# EAGLE board latchbox-lite-stencil (EAGLE 6.6.0)
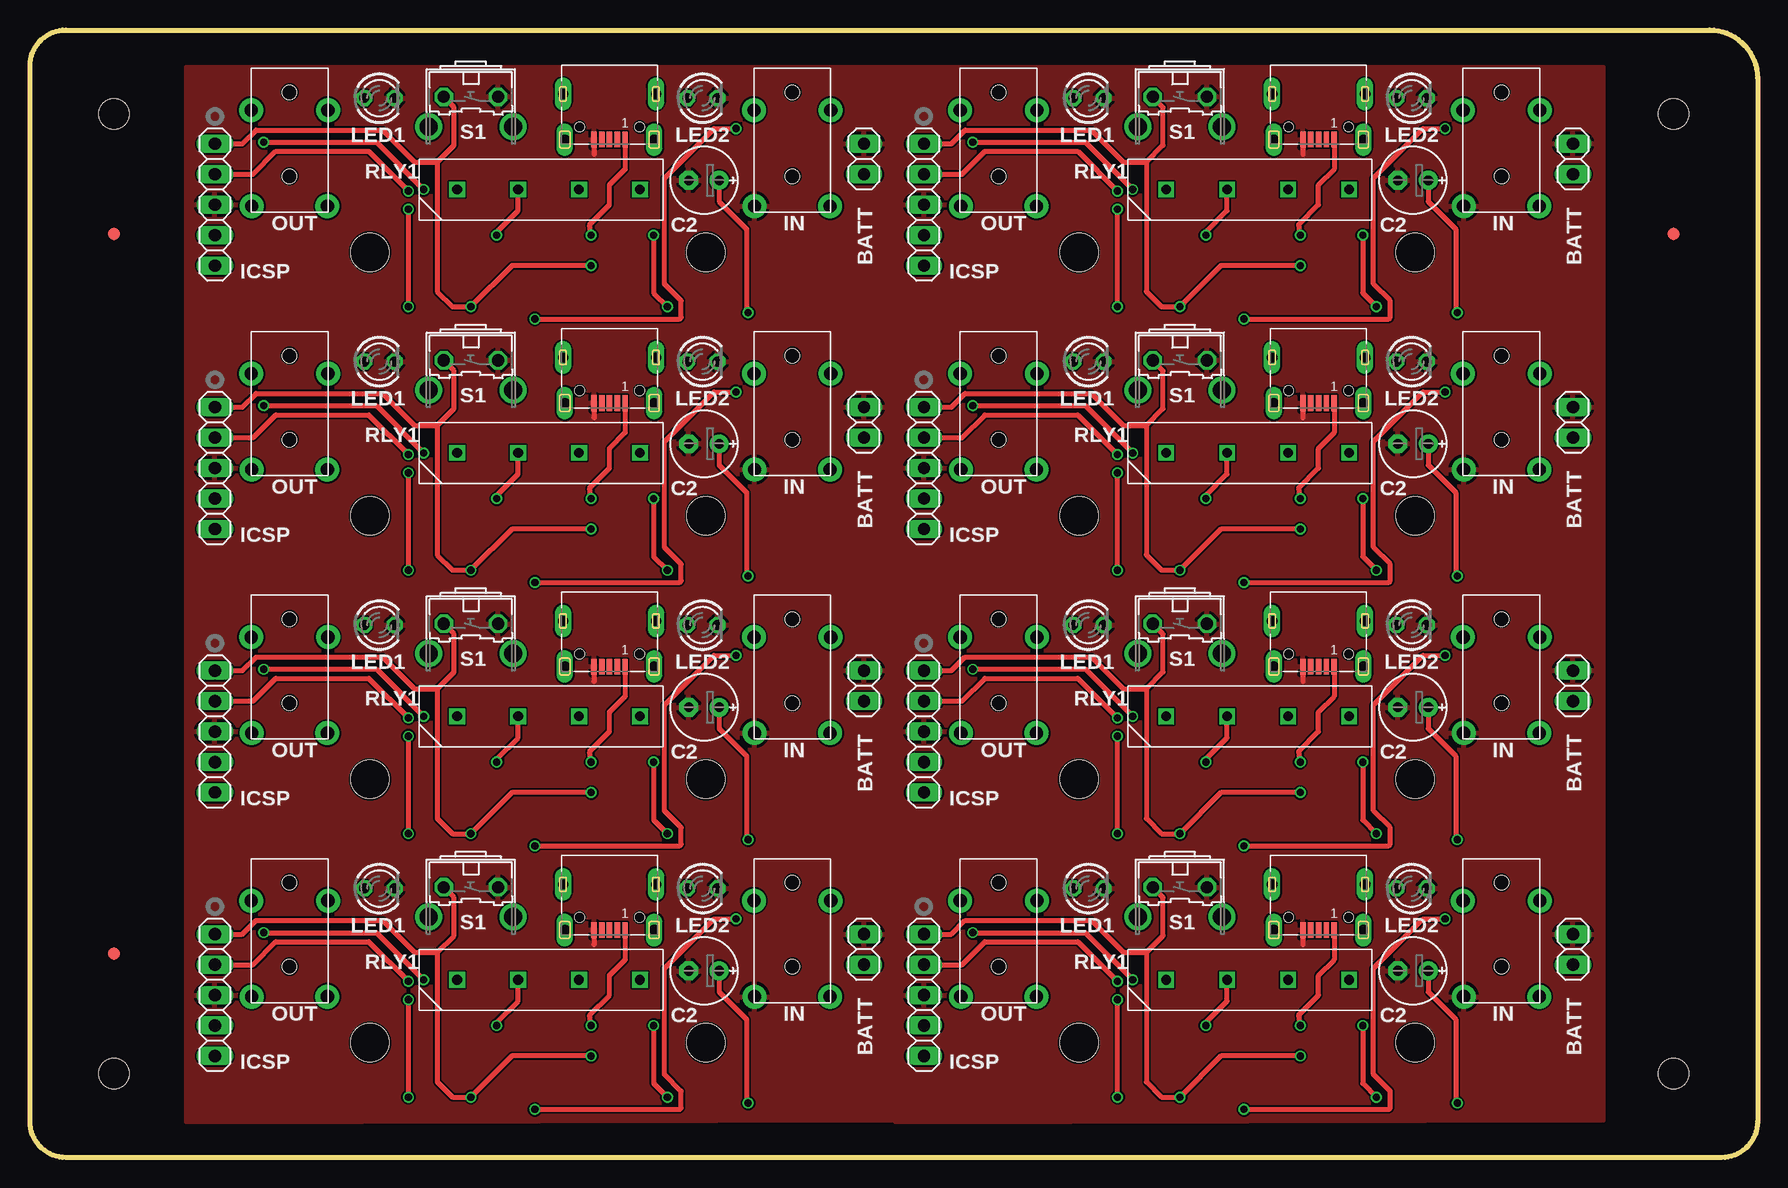
[diagram p0: board, top side]
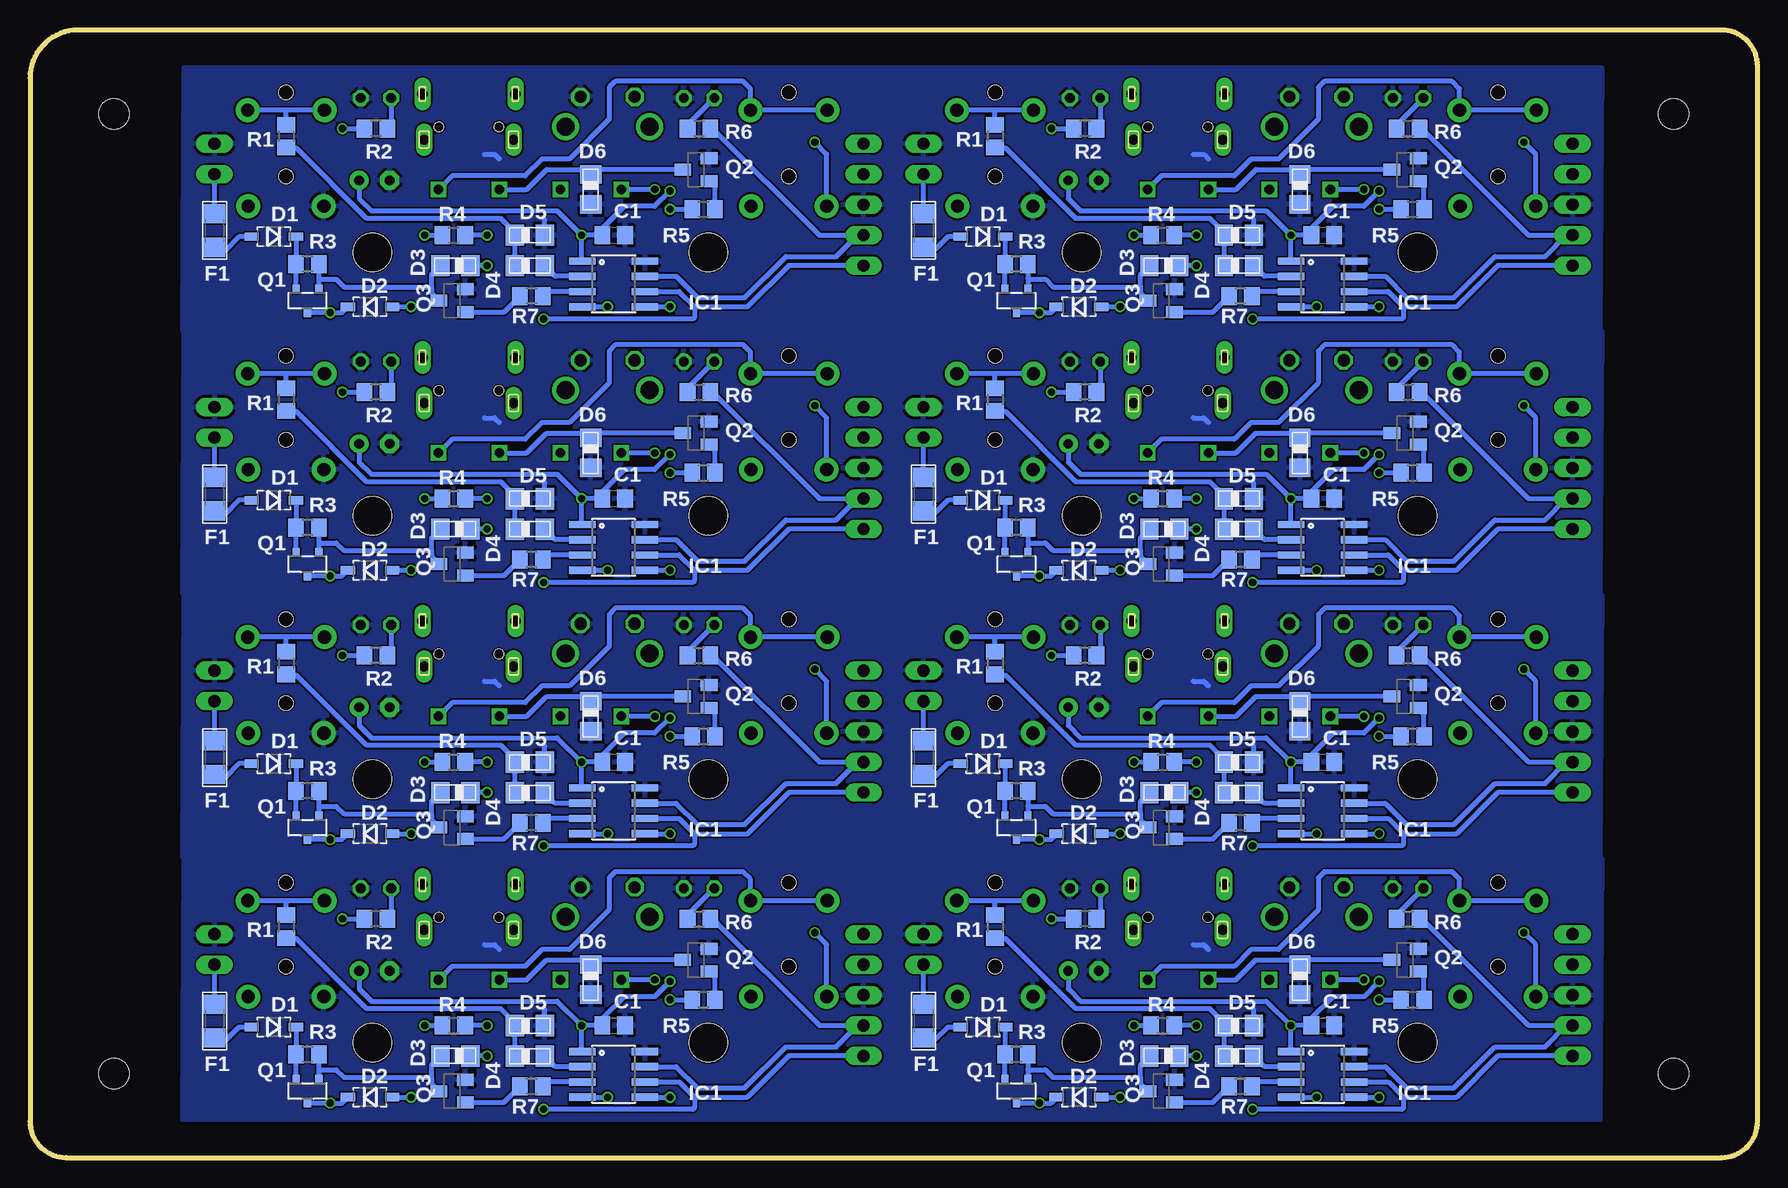
[diagram p1: board, bottom side, seen from below]

Size 144 x 94 mm. Coordinates in mm from the lower left corner, seen from the top.
Outline: 0,91 arc-90 3,94 140,94 arc-90 144,90 144,3 arc-90 141,0 3,0 arc-90 0,3 0,91
Copper layers (1*16): Top 0.035mm / dielectric 1.5mm / Bottom 0.035mm
Design rules "hackvana": minimum track width 6mil, minimum drill 0.3mm, track to track 6mil, track to pad 9mil, pad to pad 6mil, via to via 6mil, smd to smd 0mil, copper to edge 6mil, drill to drill 6mil, minimum pad ring 10mil, minimum via ring 6mil, stop-mask expansion 2mil, vias tented up to drill 100mil, thermal gap 10mil
Holes 3.2 mm at 28.34,9.57 56.34,9.57 28.34,31.54 56.34,31.54 28.34,53.5 56.34,53.5 28.34,75.46 56.34,75.46 87.44,9.57 115.44,9.57 87.44,31.54 115.44,31.54 87.44,53.5 115.44,53.5 87.44,75.46 115.44,75.46
Holes 2.54 mm at 7,87 137,87 7,7 137,7

## Footprints (pad centres in the part's own frame; a part is rotated, then mirrored left to right if it is on the bottom)
1X02 = drill 1.016 long: 1 -1.27,0; 2 1.27,0
C0805 = smd 1.3 x 1.5: 1 -0.95,0; 2 0.95,0
E2,5-6E = drill 0.813 pad 1.575: + -1.27,0 | drill 0.813 pad 1.575 octagon: - 1.27,0
SOD-123 = smd 1.2 x 0.7: A 1.85,0; C -1.85,0
0805DIODE = smd 1.524 x 1.778: A -1.262,-0.005; C 1.238,-0.005
FIDUCIAL_1MM = smd 1 x 1: 1 0,0
1206 = smd 1.6 x 1.8: 1 -1.4,0; 2 1.4,0
SO08 = smd 0.61 x 2.21: 1 -1.905,-2.616; 2 -0.635,-2.616; 3 0.635,-2.616; 4 1.905,-2.616; 5 1.905,2.616; 6 0.635,2.616; 7 -0.635,2.616; 8 -1.905,2.616
1X05 = drill 1.016 long: 1 -5.08,0; 2 -2.54,0; 3 0,0; 4 2.54,0; 5 5.08,0
3_5MM_PTH_MICRO = drill 1.1 pad 2: 1 -3.15,-8; 2 -3.2,0; 2A 3.2,0; 3 3.15,-8 | hole 1.2: 0,1.5; 0,-5.5
LED3MM = drill 0.813 octagon: A -1.27,0; K 1.27,0
SOT23-R = smd 0.6 x 0.7: 1 -0.95,-1; 2 0.95,-1; 3 0,1
SOT23-BEC = smd 1 x 1.4: B -0.95,-1.1; C 0,1.1; E 0.95,-1.1
R0805 = smd 1.3 x 1.5: 1 -0.95,0; 2 0.95,0
9007-REED-RELAY = drill 0.8 square: P$1 0,7.62; P$2 0,2.54; P$3 0,-2.54; P$4 0,-7.62
B3F-31XX = drill 1.016 octagon: 1 -2.261,-1.245; 2 2.261,-1.245 | drill 1.499 pad 2.159: 3 -3.505,1.245; 4 3.505,1.245
629105150521 = smd 0.45 x 1.3: 1 -1.3,1.05; 2 -0.65,1.05; 3 0,1.05; 4 0.65,1.05; 5 1.3,1.05 | drill 0.85 pad 1.2 long: SHELL -3.725,1.05; SHELL1 3.725,1.05; SHELL2 -3.875,-2.75; SHELL3 3.875,-2.75 | hole 0.8: -2.5,0; 2.5,0

## Placement (x,y rotation side)
BATT  [1X02]  69.52,17.35 270 top
BATT1  [1X02]  69.52,39.32 270 top
BATT2  [1X02]  69.52,61.28 270 top
BATT3  [1X02]  69.52,83.24 270 top
BATT4  [1X02]  128.62,17.35 270 top
BATT5  [1X02]  128.62,39.32 270 top
BATT6  [1X02]  128.62,61.28 270 top
BATT7  [1X02]  128.62,83.24 270 top
C1  [C0805]  36.24,11 0 bottom
C2  4u7  [E2,5-6E]  56.18,15.57 180 top
C3  [C0805]  36.24,32.97 0 bottom
C4  4u7  [E2,5-6E]  56.18,37.54 180 top
C5  [C0805]  36.24,54.93 0 bottom
C6  4u7  [E2,5-6E]  56.18,59.5 180 top
C7  [C0805]  36.24,76.89 0 bottom
C8  4u7  [E2,5-6E]  56.18,81.47 180 top
C9  [C0805]  95.35,11 0 bottom
C10  4u7  [E2,5-6E]  115.29,15.57 180 top
C11  [C0805]  95.35,32.97 0 bottom
C12  4u7  [E2,5-6E]  115.29,37.54 180 top
C13  [C0805]  95.35,54.93 0 bottom
C14  4u7  [E2,5-6E]  115.29,59.5 180 top
C15  [C0805]  95.35,76.89 0 bottom
C16  4u7  [E2,5-6E]  115.29,81.47 180 top
D1  [SOD-123]  64.56,10.87 180 bottom
D2  [SOD-123]  56.56,5.03 0 bottom
D3  0805DIODE  [0805DIODE]  49.45,8.46 180 bottom
D4  0805DIODE  [0805DIODE]  43.23,8.46 0 bottom
D5  0805DIODE  [0805DIODE]  43.23,11 0 bottom
D6  0805DIODE  [0805DIODE]  38.15,14.81 270 bottom
D7  0805DIODE  [0805DIODE]  43.23,32.97 0 bottom
D8  0805DIODE  [0805DIODE]  38.15,36.78 270 bottom
D9  [SOD-123]  64.56,32.84 180 bottom
D10  0805DIODE  [0805DIODE]  43.23,30.43 0 bottom
D11  [SOD-123]  56.56,27 0 bottom
D12  0805DIODE  [0805DIODE]  49.45,30.43 180 bottom
D13  0805DIODE  [0805DIODE]  43.23,54.93 0 bottom
D14  0805DIODE  [0805DIODE]  38.15,58.74 270 bottom
D15  [SOD-123]  64.56,54.8 180 bottom
D16  0805DIODE  [0805DIODE]  43.23,52.39 0 bottom
D17  [SOD-123]  56.56,48.96 0 bottom
D18  0805DIODE  [0805DIODE]  49.45,52.39 180 bottom
D19  0805DIODE  [0805DIODE]  43.23,76.89 0 bottom
D20  0805DIODE  [0805DIODE]  38.15,80.7 270 bottom
D21  [SOD-123]  64.56,76.77 180 bottom
D22  0805DIODE  [0805DIODE]  43.23,74.35 0 bottom
D23  [SOD-123]  56.56,70.93 0 bottom
D24  0805DIODE  [0805DIODE]  49.45,74.35 180 bottom
D25  0805DIODE  [0805DIODE]  102.33,11 0 bottom
D26  0805DIODE  [0805DIODE]  97.25,14.81 270 bottom
D27  [SOD-123]  123.67,10.87 180 bottom
D28  0805DIODE  [0805DIODE]  102.33,8.46 0 bottom
D29  [SOD-123]  115.67,5.03 0 bottom
D30  0805DIODE  [0805DIODE]  108.55,8.46 180 bottom
D31  0805DIODE  [0805DIODE]  102.33,32.97 0 bottom
D32  0805DIODE  [0805DIODE]  97.25,36.78 270 bottom
D33  [SOD-123]  123.67,32.84 180 bottom
D34  0805DIODE  [0805DIODE]  102.33,30.43 0 bottom
D35  [SOD-123]  115.67,27 0 bottom
D36  0805DIODE  [0805DIODE]  108.55,30.43 180 bottom
D37  0805DIODE  [0805DIODE]  102.33,54.93 0 bottom
D38  0805DIODE  [0805DIODE]  97.25,58.74 270 bottom
D39  [SOD-123]  123.67,54.8 180 bottom
D40  0805DIODE  [0805DIODE]  102.33,52.39 0 bottom
D41  [SOD-123]  115.67,48.96 0 bottom
D42  0805DIODE  [0805DIODE]  108.55,52.39 180 bottom
D43  0805DIODE  [0805DIODE]  102.33,76.89 0 bottom
D44  0805DIODE  [0805DIODE]  97.25,80.7 270 bottom
D45  [SOD-123]  123.67,76.77 180 bottom
D46  0805DIODE  [0805DIODE]  102.33,74.35 0 bottom
D47  [SOD-123]  115.67,70.93 0 bottom
D48  0805DIODE  [0805DIODE]  108.55,74.35 180 bottom
E$1  [FIDUCIAL_1MM]  7,77 0 top
E$2  [FIDUCIAL_1MM]  7,17 0 top
E$3  [FIDUCIAL_1MM]  137,77 0 top
F1  [1206]  69.52,11.38 270 bottom
F2  [1206]  69.52,33.35 270 bottom
F3  [1206]  69.52,55.31 270 bottom
F4  [1206]  69.52,77.28 270 bottom
F5  [1206]  128.62,11.38 270 bottom
F6  [1206]  128.62,33.35 270 bottom
F7  [1206]  128.62,55.31 270 bottom
F8  [1206]  128.62,77.28 270 bottom
IC1  PIC12F1822SO08  [SO08]  36.24,6.94 270 bottom
IC2  PIC12F1822SO08  [SO08]  36.24,28.9 270 bottom
IC3  PIC12F1822SO08  [SO08]  36.24,50.87 270 bottom
IC4  PIC12F1822SO08  [SO08]  36.24,72.83 270 bottom
IC5  PIC12F1822SO08  [SO08]  95.35,6.94 270 bottom
IC6  PIC12F1822SO08  [SO08]  95.35,28.9 270 bottom
IC7  PIC12F1822SO08  [SO08]  95.35,50.87 270 bottom
IC8  PIC12F1822SO08  [SO08]  95.35,72.83 270 bottom
ICSP  [1X05]  15.41,13.54 270 top
ICSP1  [1X05]  15.41,35.51 270 top
ICSP2  [1X05]  15.41,57.47 270 top
ICSP3  [1X05]  15.41,79.43 270 top
ICSP4  [1X05]  74.52,13.54 270 top
ICSP5  [1X05]  74.52,35.51 270 top
ICSP6  [1X05]  74.52,57.47 270 top
ICSP7  [1X05]  74.52,79.43 270 top
IN  3_5MM_PTH_MICRO  [3_5MM_PTH_MICRO]  63.55,21.41 0 top
IN1  3_5MM_PTH_MICRO  [3_5MM_PTH_MICRO]  63.55,43.38 0 top
IN2  3_5MM_PTH_MICRO  [3_5MM_PTH_MICRO]  63.55,65.34 0 top
IN3  3_5MM_PTH_MICRO  [3_5MM_PTH_MICRO]  63.55,87.31 0 top
IN4  3_5MM_PTH_MICRO  [3_5MM_PTH_MICRO]  122.65,21.41 0 top
IN5  3_5MM_PTH_MICRO  [3_5MM_PTH_MICRO]  122.65,43.38 0 top
IN6  3_5MM_PTH_MICRO  [3_5MM_PTH_MICRO]  122.65,65.34 0 top
IN7  3_5MM_PTH_MICRO  [3_5MM_PTH_MICRO]  122.65,87.31 0 top
LED1  [LED3MM]  29.13,22.43 0 top
LED2  [LED3MM]  56.05,22.43 0 top
LED3  [LED3MM]  56.05,44.4 0 top
LED4  [LED3MM]  29.13,44.4 0 top
LED5  [LED3MM]  56.05,66.36 0 top
LED6  [LED3MM]  29.13,66.36 0 top
LED7  [LED3MM]  56.05,88.32 0 top
LED8  [LED3MM]  29.13,88.32 0 top
LED9  [LED3MM]  115.16,22.43 0 top
LED10  [LED3MM]  88.23,22.43 0 top
LED11  [LED3MM]  115.16,44.4 0 top
LED12  [LED3MM]  88.23,44.4 0 top
LED13  [LED3MM]  115.16,66.36 0 top
LED14  [LED3MM]  88.23,66.36 0 top
LED15  [LED3MM]  115.16,88.32 0 top
LED16  [LED3MM]  88.23,88.32 0 top
OUT  3_5MM_PTH_MICRO  [3_5MM_PTH_MICRO]  21.64,21.41 0 top
OUT1  3_5MM_PTH_MICRO  [3_5MM_PTH_MICRO]  21.64,43.38 0 top
OUT2  3_5MM_PTH_MICRO  [3_5MM_PTH_MICRO]  21.64,65.34 0 top
OUT3  3_5MM_PTH_MICRO  [3_5MM_PTH_MICRO]  21.64,87.31 0 top
OUT4  3_5MM_PTH_MICRO  [3_5MM_PTH_MICRO]  80.74,21.41 0 top
OUT5  3_5MM_PTH_MICRO  [3_5MM_PTH_MICRO]  80.74,43.38 0 top
OUT6  3_5MM_PTH_MICRO  [3_5MM_PTH_MICRO]  80.74,65.34 0 top
OUT7  3_5MM_PTH_MICRO  [3_5MM_PTH_MICRO]  80.74,87.31 0 top
Q1  [SOT23-R]  61.77,5.54 180 bottom
Q2  [SOT23-BEC]  29.38,16.46 90 bottom
Q3  [SOT23-BEC]  49.7,5.54 90 bottom
Q4  [SOT23-R]  61.77,27.5 180 bottom
Q5  [SOT23-BEC]  29.38,38.43 90 bottom
Q6  [SOT23-BEC]  49.7,27.5 90 bottom
Q7  [SOT23-R]  61.77,49.47 180 bottom
Q8  [SOT23-BEC]  29.38,60.39 90 bottom
Q9  [SOT23-BEC]  49.7,49.47 90 bottom
Q10  [SOT23-R]  61.77,71.43 180 bottom
Q11  [SOT23-BEC]  29.38,82.36 90 bottom
Q12  [SOT23-BEC]  49.7,71.43 90 bottom
Q13  [SOT23-R]  120.87,5.54 180 bottom
Q14  [SOT23-BEC]  88.49,16.46 90 bottom
Q15  [SOT23-BEC]  108.81,5.54 90 bottom
Q16  [SOT23-R]  120.87,27.5 180 bottom
Q17  [SOT23-BEC]  88.49,38.43 90 bottom
Q18  [SOT23-BEC]  108.81,27.5 90 bottom
Q19  [SOT23-R]  120.87,49.47 180 bottom
Q20  [SOT23-BEC]  88.49,60.39 90 bottom
Q21  [SOT23-BEC]  108.81,49.47 90 bottom
Q22  [SOT23-R]  120.87,71.43 180 bottom
Q23  [SOT23-BEC]  88.49,82.36 90 bottom
Q24  [SOT23-BEC]  108.81,71.43 90 bottom
R1  100r  [R0805]  63.55,19.26 270 bottom
R2  1k  [R0805]  56.05,19.89 180 bottom
R3  10k  [R0805]  61.77,8.59 180 bottom
R4  4r7  [R0805]  49.58,11 0 bottom
R5  1k  [R0805]  28.75,13.16 0 bottom
R6  1k  [R0805]  29.13,19.89 0 bottom
R7  1k  [R0805]  43.1,5.92 180 bottom
R8  100r  [R0805]  63.55,41.22 270 bottom
R9  1k  [R0805]  28.75,35.12 0 bottom
R10  10k  [R0805]  61.77,30.55 180 bottom
R11  1k  [R0805]  29.13,41.86 0 bottom
R12  1k  [R0805]  56.05,41.86 180 bottom
R13  4r7  [R0805]  49.58,32.97 0 bottom
R14  1k  [R0805]  43.1,27.89 180 bottom
R15  100r  [R0805]  63.55,63.18 270 bottom
R16  1k  [R0805]  28.75,57.09 0 bottom
R17  10k  [R0805]  61.77,52.52 180 bottom
R18  1k  [R0805]  29.13,63.82 0 bottom
R19  1k  [R0805]  56.05,63.82 180 bottom
R20  4r7  [R0805]  49.58,54.93 0 bottom
R21  1k  [R0805]  43.1,49.85 180 bottom
R22  100r  [R0805]  63.55,85.15 270 bottom
R23  1k  [R0805]  28.75,79.05 0 bottom
R24  10k  [R0805]  61.77,74.48 180 bottom
R25  1k  [R0805]  29.13,85.78 0 bottom
R26  1k  [R0805]  56.05,85.78 180 bottom
R27  4r7  [R0805]  49.58,76.89 0 bottom
R28  1k  [R0805]  43.1,71.81 180 bottom
R29  100r  [R0805]  122.65,19.26 270 bottom
R30  1k  [R0805]  87.85,13.16 0 bottom
R31  10k  [R0805]  120.87,8.59 180 bottom
R32  1k  [R0805]  88.23,19.89 0 bottom
R33  1k  [R0805]  115.16,19.89 180 bottom
R34  4r7  [R0805]  108.68,11 0 bottom
R35  1k  [R0805]  102.2,5.92 180 bottom
R36  100r  [R0805]  122.65,41.22 270 bottom
R37  1k  [R0805]  87.85,35.12 0 bottom
R38  10k  [R0805]  120.87,30.55 180 bottom
R39  1k  [R0805]  88.23,41.86 0 bottom
R40  1k  [R0805]  115.16,41.86 180 bottom
R41  4r7  [R0805]  108.68,32.97 0 bottom
R42  1k  [R0805]  102.2,27.89 180 bottom
R43  100r  [R0805]  122.65,63.18 270 bottom
R44  1k  [R0805]  87.85,57.09 0 bottom
R45  10k  [R0805]  120.87,52.52 180 bottom
R46  1k  [R0805]  88.23,63.82 0 bottom
R47  1k  [R0805]  115.16,63.82 180 bottom
R48  4r7  [R0805]  108.68,54.93 0 bottom
R49  1k  [R0805]  102.2,49.85 180 bottom
R50  100r  [R0805]  122.65,85.15 270 bottom
R51  1k  [R0805]  87.85,79.05 0 bottom
R52  10k  [R0805]  120.87,74.48 180 bottom
R53  1k  [R0805]  88.23,85.78 0 bottom
R54  1k  [R0805]  115.16,85.78 180 bottom
R55  4r7  [R0805]  108.68,76.89 0 bottom
R56  1k  [R0805]  102.2,71.81 180 bottom
RLY1  9007-REED-RELAY  [9007-REED-RELAY]  43.23,14.81 90 top
RLY2  9007-REED-RELAY  [9007-REED-RELAY]  43.23,36.78 90 top
RLY3  9007-REED-RELAY  [9007-REED-RELAY]  43.23,58.74 90 top
RLY4  9007-REED-RELAY  [9007-REED-RELAY]  43.23,80.7 90 top
RLY5  9007-REED-RELAY  [9007-REED-RELAY]  102.33,14.81 90 top
RLY6  9007-REED-RELAY  [9007-REED-RELAY]  102.33,36.78 90 top
RLY7  9007-REED-RELAY  [9007-REED-RELAY]  102.33,58.74 90 top
RLY8  9007-REED-RELAY  [9007-REED-RELAY]  102.33,80.7 90 top
S1  [B3F-31XX]  36.75,21.29 180 top
S2  [B3F-31XX]  36.75,43.25 180 top
S3  [B3F-31XX]  36.75,65.22 180 top
S4  [B3F-31XX]  36.75,87.18 180 top
S5  [B3F-31XX]  95.85,21.29 180 top
S6  [B3F-31XX]  95.85,43.25 180 top
S7  [B3F-31XX]  95.85,65.22 180 top
S8  [B3F-31XX]  95.85,87.18 180 top
USB  [629105150521]  48.31,20.02 180 top
USB1  [629105150521]  48.31,41.98 180 top
USB2  [629105150521]  48.31,63.95 180 top
USB3  [629105150521]  48.31,85.91 180 top
USB4  [629105150521]  107.41,20.02 180 top
USB5  [629105150521]  107.41,41.98 180 top
USB6  [629105150521]  107.41,63.95 180 top
USB7  [629105150521]  107.41,85.91 180 top

## Library data of the parts
BATT BATT1-BATT7 ICSP ICSP1-ICSP7 = pinhead
C1-C16 R1-R56 = rcl
D1 D2 D9 D11 D15 D17 D21 D23 D27 D29 D33 D35 D39 D41 D45 D47 F1-F8 Q1 Q4 Q7 Q10 Q13 Q16 Q19 Q22 = microbuilder
D3-D8 D10 D12-D14 D16 D18-D20 D22 D24-D26 D28 D30-D32 D34 D36-D38 D40 D42-D44 D46 D48 IC1-IC8 = jasons_stuff
E$1-E$3 = adafruit
IN IN1-IN7 OUT OUT1-OUT7 RLY1-RLY8 USB USB1-USB7 = jason_eagle6
LED1-LED16 = led
Q2 Q3 Q5 Q6 Q8 Q9 Q11 Q12 Q14 Q15 Q17 Q18 Q20 Q21 Q23 Q24 = transistor
S1-S8 = switch-omron; MPN: B3F-3100; OC_FARNELL: 959704; OC_NEWARK: 36M3582

## Nets
GND: BATT.1 C1.2 C2.- D5.C D6.C IC1.8 ICSP.3 IN.1 LED1.K LED2.K Q2.E Q3.E S1.1 USB.5
GND1: BATT1.1 C3.2 C4.- D7.C D8.C IC2.8 ICSP1.3 IN1.1 LED3.K LED4.K Q5.E Q6.E S2.1 USB1.5
GND2: BATT2.1 C5.2 C6.- D13.C D14.C IC3.8 ICSP2.3 IN2.1 LED5.K LED6.K Q8.E Q9.E S3.1 USB2.5
GND3: BATT3.1 C7.2 C8.- D19.C D20.C IC4.8 ICSP3.3 IN3.1 LED7.K LED8.K Q11.E Q12.E S4.1 USB3.5
GND4: BATT4.1 C9.2 C10.- D25.C D26.C IC5.8 ICSP4.3 IN4.1 LED9.K LED10.K Q14.E Q15.E S5.1 USB4.5
GND5: BATT5.1 C11.2 C12.- D31.C D32.C IC6.8 ICSP5.3 IN5.1 LED11.K LED12.K Q17.E Q18.E S6.1 USB5.5
GND6: BATT6.1 C13.2 C14.- D37.C D38.C IC7.8 ICSP6.3 IN6.1 LED13.K LED14.K Q20.E Q21.E S7.1 USB6.5
GND7: BATT7.1 C15.2 C16.- D43.C D44.C IC8.8 ICSP7.3 IN7.1 LED15.K LED16.K Q23.E Q24.E S8.1 USB7.5
INPUT: D4.C IC1.2
INPUT1: D10.C IC2.2
INPUT2: D16.C IC3.2
INPUT3: D22.C IC4.2
INPUT4: D28.C IC5.2
INPUT5: D34.C IC6.2
INPUT6: D40.C IC7.2
INPUT7: D46.C IC8.2
N$1: IN.2 IN.2A R1.1
N$2: D3.C Q1.1 Q3.C R3.1
N$3: LED2.A R2.1
N$4: D1.C Q1.2 R3.2
N$5: BATT.2 F1.1
N$6: Q2.B R5.2
N$7: OUT.2 OUT.2A RLY1.P$4
N$8: OUT.1 RLY1.P$1
N$9: D6.A Q2.C RLY1.P$3
N$10: LED1.A R6.1
N$11: IC1.7 ICSP.4 R6.2
N$12: IC1.6 ICSP.5 R2.2
N$13: Q3.B R7.2
N$14: D3.A IC1.4 ICSP.1 S1.2
N$15: D1.A F1.2
N$16: R4.2 USB.1
N$17: IN1.2 IN1.2A R8.1
N$18: D9.C Q4.2 R10.2
N$19: BATT1.2 F2.1
N$20: OUT1.2 OUT1.2A RLY2.P$4
N$21: OUT1.1 RLY2.P$1
N$22: D8.A Q5.C RLY2.P$3
N$23: D12.A IC2.4 ICSP1.1 S2.2
N$24: IC2.7 ICSP1.4 R11.2
N$25: IC2.6 ICSP1.5 R12.2
N$26: LED3.A R12.1
N$27: Q5.B R9.2
N$28: D9.A F2.2
N$29: R13.2 USB1.1
N$30: LED4.A R11.1
N$31: D12.C Q4.1 Q6.C R10.1
N$32: Q6.B R14.2
N$33: IN2.2 IN2.2A R15.1
N$34: D15.C Q7.2 R17.2
N$35: BATT2.2 F3.1
N$36: OUT2.2 OUT2.2A RLY3.P$4
N$37: OUT2.1 RLY3.P$1
N$38: D14.A Q8.C RLY3.P$3
N$39: D18.A IC3.4 ICSP2.1 S3.2
N$40: IC3.7 ICSP2.4 R18.2
N$41: IC3.6 ICSP2.5 R19.2
N$42: LED5.A R19.1
N$43: Q8.B R16.2
N$44: D15.A F3.2
N$45: R20.2 USB2.1
N$46: LED6.A R18.1
N$47: D18.C Q7.1 Q9.C R17.1
N$48: Q9.B R21.2
N$49: IN3.2 IN3.2A R22.1
N$50: D21.C Q10.2 R24.2
N$51: BATT3.2 F4.1
N$52: OUT3.2 OUT3.2A RLY4.P$4
N$53: OUT3.1 RLY4.P$1
N$54: D20.A Q11.C RLY4.P$3
N$55: D24.A IC4.4 ICSP3.1 S4.2
N$56: IC4.7 ICSP3.4 R25.2
N$57: IC4.6 ICSP3.5 R26.2
N$58: LED7.A R26.1
N$59: Q11.B R23.2
N$60: D21.A F4.2
N$61: R27.2 USB3.1
N$62: LED8.A R25.1
N$63: D24.C Q10.1 Q12.C R24.1
N$64: Q12.B R28.2
N$65: IN4.2 IN4.2A R29.1
N$66: D27.C Q13.2 R31.2
N$67: BATT4.2 F5.1
N$68: OUT4.2 OUT4.2A RLY5.P$4
N$69: OUT4.1 RLY5.P$1
N$70: D26.A Q14.C RLY5.P$3
N$71: D30.A IC5.4 ICSP4.1 S5.2
N$72: IC5.7 ICSP4.4 R32.2
N$73: IC5.6 ICSP4.5 R33.2
N$74: LED9.A R33.1
N$75: Q14.B R30.2
N$76: D27.A F5.2
N$77: R34.2 USB4.1
N$78: LED10.A R32.1
N$79: D30.C Q13.1 Q15.C R31.1
N$80: Q15.B R35.2
N$81: IN5.2 IN5.2A R36.1
N$82: D33.C Q16.2 R38.2
N$83: BATT5.2 F6.1
N$84: OUT5.2 OUT5.2A RLY6.P$4
N$85: OUT5.1 RLY6.P$1
N$86: D32.A Q17.C RLY6.P$3
N$87: D36.A IC6.4 ICSP5.1 S6.2
N$88: IC6.7 ICSP5.4 R39.2
N$89: IC6.6 ICSP5.5 R40.2
N$90: LED11.A R40.1
N$91: Q17.B R37.2
N$92: D33.A F6.2
N$93: R41.2 USB5.1
N$94: LED12.A R39.1
N$95: D36.C Q16.1 Q18.C R38.1
N$96: Q18.B R42.2
N$97: IN6.2 IN6.2A R43.1
N$98: D39.C Q19.2 R45.2
N$99: BATT6.2 F7.1
N$100: OUT6.2 OUT6.2A RLY7.P$4
N$101: OUT6.1 RLY7.P$1
N$102: D38.A Q20.C RLY7.P$3
N$103: D42.A IC7.4 ICSP6.1 S7.2
N$104: IC7.7 ICSP6.4 R46.2
N$105: IC7.6 ICSP6.5 R47.2
N$106: LED13.A R47.1
N$107: Q20.B R44.2
N$108: D39.A F7.2
N$109: R48.2 USB6.1
N$110: LED14.A R46.1
N$111: D42.C Q19.1 Q21.C R45.1
N$112: Q21.B R49.2
N$113: IN7.2 IN7.2A R50.1
N$114: D45.C Q22.2 R52.2
N$115: BATT7.2 F8.1
N$116: OUT7.2 OUT7.2A RLY8.P$4
N$117: OUT7.1 RLY8.P$1
N$118: D44.A Q23.C RLY8.P$3
N$119: D48.A IC8.4 ICSP7.1 S8.2
N$120: IC8.7 ICSP7.4 R53.2
N$121: IC8.6 ICSP7.5 R54.2
N$122: LED15.A R54.1
N$123: Q23.B R51.2
N$124: D45.A F8.2
N$125: R55.2 USB7.1
N$126: LED16.A R53.1
N$127: D48.C Q22.1 Q24.C R52.1
N$128: Q24.B R56.2
OUTPUT: IC1.5 R5.1
OUTPUT1: IC2.5 R9.1
OUTPUT2: IC3.5 R16.1
OUTPUT3: IC4.5 R23.1
OUTPUT4: IC5.5 R30.1
OUTPUT5: IC6.5 R37.1
OUTPUT6: IC7.5 R44.1
OUTPUT7: IC8.5 R51.1
POWER_CTRL: IC1.3 R7.1
POWER_CTRL1: IC2.3 R14.1
POWER_CTRL2: IC3.3 R21.1
POWER_CTRL3: IC4.3 R28.1
POWER_CTRL4: IC5.3 R35.1
POWER_CTRL5: IC6.3 R42.1
POWER_CTRL6: IC7.3 R49.1
POWER_CTRL7: IC8.3 R56.1
USB_POWER: D2.A R4.1
USB_POWER1: D11.A R13.1
USB_POWER2: D17.A R20.1
USB_POWER3: D23.A R27.1
USB_POWER4: D29.A R34.1
USB_POWER5: D35.A R41.1
USB_POWER6: D41.A R48.1
USB_POWER7: D47.A R55.1
VCC: C1.1 C2.+ D2.C IC1.1 ICSP.2 Q1.3 RLY1.P$2
VCC1: C3.1 C4.+ D11.C IC2.1 ICSP1.2 Q4.3 RLY2.P$2
VCC2: C5.1 C6.+ D17.C IC3.1 ICSP2.2 Q7.3 RLY3.P$2
VCC3: C7.1 C8.+ D23.C IC4.1 ICSP3.2 Q10.3 RLY4.P$2
VCC4: C9.1 C10.+ D29.C IC5.1 ICSP4.2 Q13.3 RLY5.P$2
VCC5: C11.1 C12.+ D35.C IC6.1 ICSP5.2 Q16.3 RLY6.P$2
VCC6: C13.1 C14.+ D41.C IC7.1 ICSP6.2 Q19.3 RLY7.P$2
VCC7: C15.1 C16.+ D47.C IC8.1 ICSP7.2 Q22.3 RLY8.P$2
Z: D4.A D5.A R1.2
Z1: D7.A D10.A R8.2
Z2: D13.A D16.A R15.2
Z3: D19.A D22.A R22.2
Z4: D25.A D28.A R29.2
Z5: D31.A D34.A R36.2
Z6: D37.A D40.A R43.2
Z7: D43.A D46.A R50.2

## Tracks (layer width: path | path; a pad name or v marks a point on that pad's centre or on a via)
GND
  Top 0.406: USB.5 47.01,17.76 47.04,17.73
  Bottom 0.406: D5.C 41.99,12.33 | 47.04,17.73 46.15,17.73 45.77,17.35
  pour Bottom: 13,24.97 13.13,3.13 72.18,3.13 72.06,24.97
  pour Top: 13,24.97 13,3 72.06,3.13 72.06,24.97
GND1
  Top 0.406: USB1.5 47.01,39.73 47.04,39.7
  Bottom 0.406: D7.C 41.99,34.29 | 47.04,39.7 46.15,39.7 45.77,39.31
  pour Bottom: 13,46.94 13.13,25.09 72.18,25.09 72.06,46.94
  pour Top: 13,46.94 13,24.96 72.06,25.09 72.06,46.94
GND2
  Top 0.406: USB2.5 47.01,61.69 47.04,61.66
  Bottom 0.406: D13.C 41.99,56.26 | 47.04,61.66 46.15,61.66 45.77,61.28
  pour Bottom: 13,68.9 13.13,47.06 72.18,47.06 72.06,68.9
  pour Top: 13,68.9 13,46.93 72.06,47.06 72.06,68.9
GND3
  Top 0.406: USB3.5 47.01,83.66 47.04,83.62
  Bottom 0.406: D19.C 41.99,78.22 | 47.04,83.62 46.15,83.62 45.77,83.24
  pour Bottom: 13,90.86 13.13,69.02 72.18,69.02 72.06,90.86
  pour Top: 13,90.86 13,68.89 72.06,69.02 72.06,90.86
GND4
  Top 0.406: USB4.5 106.11,17.76 106.14,17.73
  Bottom 0.406: D25.C 101.09,12.33 | 106.14,17.73 105.25,17.73 104.87,17.35
  pour Bottom: 72.11,24.97 72.23,3.13 131.29,3.13 131.16,24.97
  pour Top: 72.11,24.97 72.11,3 131.16,3.13 131.16,24.97
GND5
  Top 0.406: USB5.5 106.11,39.73 106.14,39.7
  Bottom 0.406: D31.C 101.09,34.29 | 106.14,39.7 105.25,39.7 104.87,39.31
  pour Bottom: 72.11,46.94 72.23,25.09 131.29,25.09 131.16,46.94
  pour Top: 72.11,46.94 72.11,24.96 131.16,25.09 131.16,46.94
GND6
  Top 0.406: USB6.5 106.11,61.69 106.14,61.66
  Bottom 0.406: D37.C 101.09,56.26 | 106.14,61.66 105.25,61.66 104.87,61.28
  pour Bottom: 72.11,68.9 72.23,47.06 131.29,47.06 131.16,68.9
  pour Top: 72.11,68.9 72.11,46.93 131.16,47.06 131.16,68.9
GND7
  Top 0.406: USB7.5 106.11,83.66 106.14,83.62
  Bottom 0.406: D43.C 101.09,78.22 | 106.14,83.62 105.25,83.62 104.87,83.24
  pour Bottom: 72.11,90.86 72.23,69.02 131.29,69.02 131.16,90.86
  pour Top: 72.11,90.86 72.11,68.89 131.16,69.02 131.16,90.86
INPUT
  Bottom 0.406: IC1.2 41.1,7.57 D4.C
INPUT1
  Bottom 0.406: IC2.2 41.1,29.54 D10.C
INPUT2
  Bottom 0.406: IC3.2 41.1,51.5 D16.C
INPUT3
  Bottom 0.406: IC4.2 41.1,73.47 D22.C
INPUT4
  Bottom 0.406: IC5.2 100.21,7.57 D28.C
INPUT5
  Bottom 0.406: IC6.2 100.21,29.54 D34.C
INPUT6
  Bottom 0.406: IC7.2 100.21,51.5 D40.C
INPUT7
  Bottom 0.406: IC8.2 100.21,73.47 D46.C
N$1
  Bottom 0.406: IN.2 63.55,21.41 | 63.55,21.41 IN.2A | R1.1 63.55,21.41
N$2
  Bottom 0.406: 51.43,6.68 51.43,6.16 Q3.C | Q1.1 R3.1 60.82,7.38 60.75,7.32 59.35,7.32 58.72,6.68 51.43,6.68 | 51.43,6.68 51.43,7.73 D3.C
N$3
  Bottom 0.406: LED2.A 54.78,20.21 R2.1
N$4
  Bottom 0.406: Q1.2 R3.2 D1.C
N$5
  Bottom 0.406: F1.1 BATT.2
N$6
  Bottom 0.406: R5.2 27.8,15.03 Q2.B
N$7
  Bottom 0.406: OUT.2 OUT.2A 24.84,23.22 25.45,23.83 36.11,23.83 36.62,23.32 36.62,20.65 39.92,17.35 42.21,17.35 43.61,15.95 49.7,15.95 RLY1.P$4
N$8  (via drill 0.6)
  Top 0.406: v19.48,18.75 28.88,18.75 v32.81,14.81
  Bottom 0.406: OUT.1 18.49,17.76 v19.48,18.75 | v32.81,14.81 RLY1.P$1
N$9
  Bottom 0.406: Q2.C 37.76,16.46 | 37.76,16.46 D6.A | RLY1.P$3 43.48,14.81 41.83,16.46 37.76,16.46
N$10
  Bottom 0.406: R6.1 30.08,20.21 LED1.A
N$11
  Bottom 0.406: R6.2 27.99,19.89 19.1,11 ICSP.4 15.92,11 17.7,9.22 21.89,9.22 25.32,5.79 29.26,5.79 31.03,7.57 IC1.7
N$12  (via drill 0.6)
  Top 0.406: v42.08,4.02 54.15,4.02 54.27,4.14 54.27,5.54 52.88,6.94 52.88,15.77 R2.2 v58.85,19.89
  Bottom 0.406: ICSP.5 21.64,8.46 25.07,5.03 29.51,5.03 | IC1.6 30.78,6.3 29.51,5.03 | 29.51,5.03 29.51,4.14 29.64,4.02 v42.08,4.02 | v58.85,19.89 R2.2
N$13
  Bottom 0.406: Q3.B 45.38,4.59 R7.2
N$14  (via drill 0.6)
  Top 0.406: 33.95,17.1 35.35,18.49 35.35,21.67 S1.2 | 33.95,17.1 33.95,6.3 35.23,5.03 v36.75,5.03 40.18,8.46 v46.78,8.46 | ICSP.1 17.7,18.62 18.84,19.76 29.38,19.76 32.05,17.1 33.95,17.1
  Bottom 0.406: IC1.4 v36.75,5.03 | v46.78,8.46 D3.A
N$15
  Bottom 0.406: D1.A 67.48,10.87 68.63,9.73 69.26,9.73 F1.2
N$16  (via drill 0.6)
  Top 0.406: USB.1 49.61,16.49 48.31,15.19 48.31,13.54 46.66,11.89 v46.78,11
  Bottom 0.406: 48.81,11.19 R4.2 v46.78,11
N$17
  Bottom 0.406: IN1.2 63.55,43.38 | 63.55,43.38 IN1.2A | R8.1 63.55,43.38
N$18
  Bottom 0.406: Q4.2 R10.2 D9.C
N$19
  Bottom 0.406: F2.1 BATT1.2
N$20
  Bottom 0.406: OUT1.2 OUT1.2A 24.84,45.18 25.45,45.79 36.11,45.79 36.62,45.28 36.62,42.62 39.92,39.31 42.21,39.31 43.61,37.92 49.7,37.92 RLY2.P$4
N$21  (via drill 0.6)
  Top 0.406: v19.48,40.71 28.88,40.71 v32.81,36.77
  Bottom 0.406: OUT1.1 18.49,39.72 v19.48,40.71 | v32.81,36.77 RLY2.P$1
N$22
  Bottom 0.406: Q5.C 37.76,38.43 | 37.76,38.43 D8.A | RLY2.P$3 43.48,36.77 41.83,38.43 37.76,38.43
N$23  (via drill 0.6)
  Top 0.406: 33.95,39.06 35.35,40.46 35.35,43.63 S2.2 | 33.95,39.06 33.95,28.27 35.23,27 v36.75,27 40.18,30.43 v46.78,30.43 | ICSP1.1 17.7,40.59 18.84,41.73 29.38,41.73 32.05,39.06 33.95,39.06
  Bottom 0.406: IC2.4 v36.75,27 | v46.78,30.43 D12.A
N$24
  Bottom 0.406: R11.2 27.99,41.85 19.1,32.97 ICSP1.4 15.92,32.97 17.7,31.19 21.89,31.19 25.32,27.76 29.26,27.76 31.03,29.54 IC2.7
N$25  (via drill 0.6)
  Top 0.406: v42.08,25.98 54.15,25.98 54.27,26.11 54.27,27.5 52.88,28.9 52.88,37.73 R12.2 v58.85,41.85
  Bottom 0.406: ICSP1.5 21.64,30.43 25.07,27 29.51,27 | IC2.6 30.78,28.27 29.51,27 | 29.51,27 29.51,26.11 29.64,25.98 v42.08,25.98 | v58.85,41.85 R12.2
N$26
  Bottom 0.406: LED3.A 54.78,42.17 R12.1
N$27
  Bottom 0.406: R9.2 27.8,36.99 Q5.B
N$28
  Bottom 0.406: D9.A 67.48,32.84 68.63,31.7 69.26,31.7 F2.2
N$29  (via drill 0.6)
  Top 0.406: USB1.1 49.61,38.46 48.31,37.16 48.31,35.51 46.66,33.85 v46.78,32.97
  Bottom 0.406: 48.81,33.15 R13.2 v46.78,32.97
N$30
  Bottom 0.406: R11.1 30.08,42.17 LED4.A
N$31
  Bottom 0.406: 51.43,28.65 51.43,28.13 Q6.C | Q4.1 R10.1 60.82,29.35 60.75,29.28 59.35,29.28 58.72,28.65 51.43,28.65 | 51.43,28.65 51.43,29.69 D12.C
N$32
  Bottom 0.406: Q6.B 45.38,26.55 R14.2
N$33
  Bottom 0.406: IN2.2 63.55,65.34 | 63.55,65.34 IN2.2A | R15.1 63.55,65.34
N$34
  Bottom 0.406: Q7.2 R17.2 D15.C
N$35
  Bottom 0.406: F3.1 BATT2.2
N$36
  Bottom 0.406: OUT2.2 OUT2.2A 24.84,67.15 25.45,67.76 36.11,67.76 36.62,67.25 36.62,64.58 39.92,61.28 42.21,61.28 43.61,59.88 49.7,59.88 RLY3.P$4
N$37  (via drill 0.6)
  Top 0.406: v19.48,62.68 28.88,62.68 v32.81,58.74
  Bottom 0.406: OUT2.1 18.49,61.69 v19.48,62.68 | v32.81,58.74 RLY3.P$1
N$38
  Bottom 0.406: Q8.C 37.76,60.39 | 37.76,60.39 D14.A | RLY3.P$3 43.48,58.74 41.83,60.39 37.76,60.39
N$39  (via drill 0.6)
  Top 0.406: 33.95,61.03 35.35,62.42 35.35,65.6 S3.2 | 33.95,61.03 33.95,50.23 35.23,48.96 v36.75,48.96 40.18,52.39 v46.78,52.39 | ICSP2.1 17.7,62.55 18.84,63.69 29.38,63.69 32.05,61.03 33.95,61.03
  Bottom 0.406: IC3.4 v36.75,48.96 | v46.78,52.39 D18.A
N$40
  Bottom 0.406: R18.2 27.99,63.82 19.1,54.93 ICSP2.4 15.92,54.93 17.7,53.15 21.89,53.15 25.32,49.72 29.26,49.72 31.03,51.5 IC3.7
N$41  (via drill 0.6)
  Top 0.406: v42.08,47.95 54.15,47.95 54.27,48.07 54.27,49.47 52.88,50.87 52.88,59.7 R19.2 v58.85,63.82
  Bottom 0.406: ICSP2.5 21.64,52.39 25.07,48.96 29.51,48.96 | IC3.6 30.78,50.23 29.51,48.96 | 29.51,48.96 29.51,48.07 29.64,47.95 v42.08,47.95 | v58.85,63.82 R19.2
N$42
  Bottom 0.406: LED5.A 54.78,64.14 R19.1
N$43
  Bottom 0.406: R16.2 27.8,58.96 Q8.B
N$44
  Bottom 0.406: D15.A 67.48,54.8 68.63,53.66 69.26,53.66 F3.2
N$45  (via drill 0.6)
  Top 0.406: USB2.1 49.61,60.42 48.31,59.12 48.31,57.47 46.66,55.82 v46.78,54.93
  Bottom 0.406: 48.81,55.12 R20.2 v46.78,54.93
N$46
  Bottom 0.406: R18.1 30.08,64.14 LED6.A
N$47
  Bottom 0.406: 51.43,50.61 51.43,50.09 Q9.C | Q7.1 R17.1 60.82,51.31 60.75,51.25 59.35,51.25 58.72,50.61 51.43,50.61 | 51.43,50.61 51.43,51.66 D18.C
N$48
  Bottom 0.406: Q9.B 45.38,48.52 R21.2
N$49
  Bottom 0.406: IN3.2 63.55,87.31 | 63.55,87.31 IN3.2A | R22.1 63.55,87.31
N$50
  Bottom 0.406: Q10.2 R24.2 D21.C
N$51
  Bottom 0.406: F4.1 BATT3.2
N$52
  Bottom 0.406: OUT3.2 OUT3.2A 24.84,89.11 25.45,89.72 36.11,89.72 36.62,89.21 36.62,86.55 39.92,83.24 42.21,83.24 43.61,81.85 49.7,81.85 RLY4.P$4
N$53  (via drill 0.6)
  Top 0.406: v19.48,84.64 28.88,84.64 v32.81,80.7
  Bottom 0.406: OUT3.1 18.49,83.65 v19.48,84.64 | v32.81,80.7 RLY4.P$1
N$54
  Bottom 0.406: Q11.C 37.76,82.36 | 37.76,82.36 D20.A | RLY4.P$3 43.48,80.7 41.83,82.36 37.76,82.36
N$55  (via drill 0.6)
  Top 0.406: 33.95,82.99 35.35,84.39 35.35,87.56 S4.2 | 33.95,82.99 33.95,72.19 35.23,70.92 v36.75,70.92 40.18,74.35 v46.78,74.35 | ICSP3.1 17.7,84.51 18.84,85.66 29.38,85.66 32.05,82.99 33.95,82.99
  Bottom 0.406: IC4.4 v36.75,70.92 | v46.78,74.35 D24.A
N$56
  Bottom 0.406: R25.2 27.99,85.78 19.1,76.89 ICSP3.4 15.92,76.89 17.7,75.12 21.89,75.12 25.32,71.69 29.26,71.69 31.03,73.47 IC4.7
N$57  (via drill 0.6)
  Top 0.406: v42.08,69.91 54.15,69.91 54.27,70.04 54.27,71.43 52.88,72.83 52.88,81.66 R26.2 v58.85,85.78
  Bottom 0.406: ICSP3.5 21.64,74.35 25.07,70.92 29.51,70.92 | IC4.6 30.78,72.19 29.51,70.92 | 29.51,70.92 29.51,70.04 29.64,69.91 v42.08,69.91 | v58.85,85.78 R26.2
N$58
  Bottom 0.406: LED7.A 54.78,86.1 R26.1
N$59
  Bottom 0.406: R23.2 27.8,80.92 Q11.B
N$60
  Bottom 0.406: D21.A 67.48,76.77 68.63,75.62 69.26,75.62 F4.2
N$61  (via drill 0.6)
  Top 0.406: USB3.1 49.61,82.39 48.31,81.08 48.31,79.43 46.66,77.78 v46.78,76.89
  Bottom 0.406: 48.81,77.08 R27.2 v46.78,76.89
N$62
  Bottom 0.406: R25.1 30.08,86.1 LED8.A
N$63
  Bottom 0.406: 51.43,72.58 51.43,72.06 Q12.C | Q10.1 R24.1 60.82,73.28 60.75,73.21 59.35,73.21 58.72,72.58 51.43,72.58 | 51.43,72.58 51.43,73.62 D24.C
N$64
  Bottom 0.406: Q12.B 45.38,70.48 R28.2
N$65
  Bottom 0.406: IN4.2 122.65,21.41 | 122.65,21.41 IN4.2A | R29.1 122.65,21.41
N$66
  Bottom 0.406: Q13.2 R31.2 D27.C
N$67
  Bottom 0.406: F5.1 BATT4.2
N$68
  Bottom 0.406: OUT4.2 OUT4.2A 83.94,23.22 84.55,23.83 95.22,23.83 95.73,23.32 95.73,20.65 99.03,17.35 101.32,17.35 102.71,15.95 108.81,15.95 RLY5.P$4
N$69  (via drill 0.6)
  Top 0.406: v78.58,18.75 87.98,18.75 v91.92,14.81
  Bottom 0.406: OUT4.1 77.59,17.76 v78.58,18.75 | v91.92,14.81 RLY5.P$1
N$70
  Bottom 0.406: Q14.C 96.87,16.46 | 96.87,16.46 D26.A | RLY5.P$3 102.59,14.81 100.94,16.46 96.87,16.46
N$71  (via drill 0.6)
  Top 0.406: 93.06,17.1 94.46,18.49 94.46,21.67 S5.2 | 93.06,17.1 93.06,6.3 94.33,5.03 v95.86,5.03 99.28,8.46 v105.89,8.46 | ICSP4.1 76.81,18.62 77.95,19.76 88.49,19.76 91.16,17.1 93.06,17.1
  Bottom 0.406: IC5.4 v95.86,5.03 | v105.89,8.46 D30.A
N$72
  Bottom 0.406: R32.2 87.09,19.89 78.2,11 ICSP4.4 75.03,11 76.81,9.22 81,9.22 84.42,5.79 88.36,5.79 90.14,7.57 IC5.7
N$73  (via drill 0.6)
  Top 0.406: v101.19,4.02 113.25,4.02 113.38,4.14 113.38,5.54 111.98,6.94 111.98,15.77 R33.2 v117.95,19.89
  Bottom 0.406: ICSP4.5 80.74,8.46 84.17,5.03 88.62,5.03 | IC5.6 89.89,6.3 88.62,5.03 | 88.62,5.03 88.62,4.14 88.74,4.02 v101.19,4.02 | v117.95,19.89 R33.2
N$74
  Bottom 0.406: LED9.A 113.89,20.21 R33.1
N$75
  Bottom 0.406: R30.2 86.9,15.03 Q14.B
N$76
  Bottom 0.406: D27.A 126.59,10.87 127.73,9.73 128.37,9.73 F5.2
N$77  (via drill 0.6)
  Top 0.406: USB4.1 108.71,16.49 107.41,15.19 107.41,13.54 105.76,11.89 v105.89,11
  Bottom 0.406: 107.92,11.19 R34.2 v105.89,11
N$78
  Bottom 0.406: R32.1 89.19,20.21 LED10.A
N$79
  Bottom 0.406: 110.53,6.68 110.53,6.16 Q15.C | Q13.1 R31.1 119.92,7.38 119.86,7.32 118.46,7.32 117.83,6.68 110.53,6.68 | 110.53,6.68 110.53,7.73 D30.C
N$80
  Bottom 0.406: Q15.B 104.49,4.59 R35.2
N$81
  Bottom 0.406: IN5.2 122.65,43.38 | 122.65,43.38 IN5.2A | R36.1 122.65,43.38
N$82
  Bottom 0.406: Q16.2 R38.2 D33.C
N$83
  Bottom 0.406: F6.1 BATT5.2
N$84
  Bottom 0.406: OUT5.2 OUT5.2A 83.94,45.18 84.55,45.79 95.22,45.79 95.73,45.28 95.73,42.62 99.03,39.31 101.32,39.31 102.71,37.92 108.81,37.92 RLY6.P$4
N$85  (via drill 0.6)
  Top 0.406: v78.58,40.71 87.98,40.71 v91.92,36.77
  Bottom 0.406: OUT5.1 77.59,39.72 v78.58,40.71 | v91.92,36.77 RLY6.P$1
N$86
  Bottom 0.406: Q17.C 96.87,38.43 | 96.87,38.43 D32.A | RLY6.P$3 102.59,36.77 100.94,38.43 96.87,38.43
N$87  (via drill 0.6)
  Top 0.406: 93.06,39.06 94.46,40.46 94.46,43.63 S6.2 | 93.06,39.06 93.06,28.27 94.33,27 v95.86,27 99.28,30.43 v105.89,30.43 | ICSP5.1 76.81,40.59 77.95,41.73 88.49,41.73 91.16,39.06 93.06,39.06
  Bottom 0.406: IC6.4 v95.86,27 | v105.89,30.43 D36.A
N$88
  Bottom 0.406: R39.2 87.09,41.85 78.2,32.97 ICSP5.4 75.03,32.97 76.81,31.19 81,31.19 84.42,27.76 88.36,27.76 90.14,29.54 IC6.7
N$89  (via drill 0.6)
  Top 0.406: v101.19,25.98 113.25,25.98 113.38,26.11 113.38,27.5 111.98,28.9 111.98,37.73 R40.2 v117.95,41.85
  Bottom 0.406: ICSP5.5 80.74,30.43 84.17,27 88.62,27 | IC6.6 89.89,28.27 88.62,27 | 88.62,27 88.62,26.11 88.74,25.98 v101.19,25.98 | v117.95,41.85 R40.2
N$90
  Bottom 0.406: LED11.A 113.89,42.17 R40.1
N$91
  Bottom 0.406: R37.2 86.9,36.99 Q17.B
N$92
  Bottom 0.406: D33.A 126.59,32.84 127.73,31.7 128.37,31.7 F6.2
N$93  (via drill 0.6)
  Top 0.406: USB5.1 108.71,38.46 107.41,37.16 107.41,35.51 105.76,33.85 v105.89,32.97
  Bottom 0.406: 107.92,33.15 R41.2 v105.89,32.97
N$94
  Bottom 0.406: R39.1 89.19,42.17 LED12.A
N$95
  Bottom 0.406: 110.53,28.65 110.53,28.13 Q18.C | Q16.1 R38.1 119.92,29.35 119.86,29.28 118.46,29.28 117.83,28.65 110.53,28.65 | 110.53,28.65 110.53,29.69 D36.C
N$96
  Bottom 0.406: Q18.B 104.49,26.55 R42.2
N$97
  Bottom 0.406: IN6.2 122.65,65.34 | 122.65,65.34 IN6.2A | R43.1 122.65,65.34
N$98
  Bottom 0.406: Q19.2 R45.2 D39.C
N$99
  Bottom 0.406: F7.1 BATT6.2
N$100
  Bottom 0.406: OUT6.2 OUT6.2A 83.94,67.15 84.55,67.76 95.22,67.76 95.73,67.25 95.73,64.58 99.03,61.28 101.32,61.28 102.71,59.88 108.81,59.88 RLY7.P$4
N$101  (via drill 0.6)
  Top 0.406: v78.58,62.68 87.98,62.68 v91.92,58.74
  Bottom 0.406: OUT6.1 77.59,61.69 v78.58,62.68 | v91.92,58.74 RLY7.P$1
N$102
  Bottom 0.406: Q20.C 96.87,60.39 | 96.87,60.39 D38.A | RLY7.P$3 102.59,58.74 100.94,60.39 96.87,60.39
N$103  (via drill 0.6)
  Top 0.406: 93.06,61.03 94.46,62.42 94.46,65.6 S7.2 | 93.06,61.03 93.06,50.23 94.33,48.96 v95.86,48.96 99.28,52.39 v105.89,52.39 | ICSP6.1 76.81,62.55 77.95,63.69 88.49,63.69 91.16,61.03 93.06,61.03
  Bottom 0.406: IC7.4 v95.86,48.96 | v105.89,52.39 D42.A
N$104
  Bottom 0.406: R46.2 87.09,63.82 78.2,54.93 ICSP6.4 75.03,54.93 76.81,53.15 81,53.15 84.42,49.72 88.36,49.72 90.14,51.5 IC7.7
N$105  (via drill 0.6)
  Top 0.406: v101.19,47.95 113.25,47.95 113.38,48.07 113.38,49.47 111.98,50.87 111.98,59.7 R47.2 v117.95,63.82
  Bottom 0.406: ICSP6.5 80.74,52.39 84.17,48.96 88.62,48.96 | IC7.6 89.89,50.23 88.62,48.96 | 88.62,48.96 88.62,48.07 88.74,47.95 v101.19,47.95 | v117.95,63.82 R47.2
N$106
  Bottom 0.406: LED13.A 113.89,64.14 R47.1
N$107
  Bottom 0.406: R44.2 86.9,58.96 Q20.B
N$108
  Bottom 0.406: D39.A 126.59,54.8 127.73,53.66 128.37,53.66 F7.2
N$109  (via drill 0.6)
  Top 0.406: USB6.1 108.71,60.42 107.41,59.12 107.41,57.47 105.76,55.82 v105.89,54.93
  Bottom 0.406: 107.92,55.12 R48.2 v105.89,54.93
N$110
  Bottom 0.406: R46.1 89.19,64.14 LED14.A
N$111
  Bottom 0.406: 110.53,50.61 110.53,50.09 Q21.C | Q19.1 R45.1 119.92,51.31 119.86,51.25 118.46,51.25 117.83,50.61 110.53,50.61 | 110.53,50.61 110.53,51.66 D42.C
N$112
  Bottom 0.406: Q21.B 104.49,48.52 R49.2
N$113
  Bottom 0.406: IN7.2 122.65,87.31 | 122.65,87.31 IN7.2A | R50.1 122.65,87.31
N$114
  Bottom 0.406: Q22.2 R52.2 D45.C
N$115
  Bottom 0.406: F8.1 BATT7.2
N$116
  Bottom 0.406: OUT7.2 OUT7.2A 83.94,89.11 84.55,89.72 95.22,89.72 95.73,89.21 95.73,86.55 99.03,83.24 101.32,83.24 102.71,81.85 108.81,81.85 RLY8.P$4
N$117  (via drill 0.6)
  Top 0.406: v78.58,84.64 87.98,84.64 v91.92,80.7
  Bottom 0.406: OUT7.1 77.59,83.65 v78.58,84.64 | v91.92,80.7 RLY8.P$1
N$118
  Bottom 0.406: Q23.C 96.87,82.36 | 96.87,82.36 D44.A | RLY8.P$3 102.59,80.7 100.94,82.36 96.87,82.36
N$119  (via drill 0.6)
  Top 0.406: 93.06,82.99 94.46,84.39 94.46,87.56 S8.2 | 93.06,82.99 93.06,72.19 94.33,70.92 v95.86,70.92 99.28,74.35 v105.89,74.35 | ICSP7.1 76.81,84.51 77.95,85.66 88.49,85.66 91.16,82.99 93.06,82.99
  Bottom 0.406: IC8.4 v95.86,70.92 | v105.89,74.35 D48.A
N$120
  Bottom 0.406: R53.2 87.09,85.78 78.2,76.89 ICSP7.4 75.03,76.89 76.81,75.12 81,75.12 84.42,71.69 88.36,71.69 90.14,73.47 IC8.7
N$121  (via drill 0.6)
  Top 0.406: v101.19,69.91 113.25,69.91 113.38,70.04 113.38,71.43 111.98,72.83 111.98,81.66 R54.2 v117.95,85.78
  Bottom 0.406: ICSP7.5 80.74,74.35 84.17,70.92 88.62,70.92 | IC8.6 89.89,72.19 88.62,70.92 | 88.62,70.92 88.62,70.04 88.74,69.91 v101.19,69.91 | v117.95,85.78 R54.2
N$122
  Bottom 0.406: LED15.A 113.89,86.1 R54.1
N$123
  Bottom 0.406: R51.2 86.9,80.92 Q23.B
N$124
  Bottom 0.406: D45.A 126.59,76.77 127.73,75.62 128.37,75.62 F8.2
N$125  (via drill 0.6)
  Top 0.406: USB7.1 108.71,82.39 107.41,81.08 107.41,79.43 105.76,77.78 v105.89,76.89
  Bottom 0.406: 107.92,77.08 R55.2 v105.89,76.89
N$126
  Bottom 0.406: R53.1 89.19,86.1 LED16.A
N$127
  Bottom 0.406: 110.53,72.58 110.53,72.06 Q24.C | Q22.1 R52.1 119.92,73.28 119.86,73.21 118.46,73.21 117.83,72.58 110.53,72.58 | 110.53,72.58 110.53,73.62 D48.C
N$128
  Bottom 0.406: Q24.B 104.49,70.48 R56.2
OUTPUT  (via drill 0.6)
  Top 0.406: v31.54,5.03 v31.54,13.16
  Bottom 0.406: IC1.5 v31.54,5.03 | v31.54,13.16 R5.1
OUTPUT1  (via drill 0.6)
  Top 0.406: v31.54,27 v31.54,35.12
  Bottom 0.406: IC2.5 v31.54,27 | v31.54,35.12 R9.1
OUTPUT2  (via drill 0.6)
  Top 0.406: v31.54,48.96 v31.54,57.09
  Bottom 0.406: IC3.5 v31.54,48.96 | v31.54,57.09 R16.1
OUTPUT3  (via drill 0.6)
  Top 0.406: v31.54,70.92 v31.54,79.05
  Bottom 0.406: IC4.5 v31.54,70.92 | v31.54,79.05 R23.1
OUTPUT4  (via drill 0.6)
  Top 0.406: v90.65,5.03 v90.65,13.16
  Bottom 0.406: IC5.5 v90.65,5.03 | v90.65,13.16 R30.1
OUTPUT5  (via drill 0.6)
  Top 0.406: v90.65,27 v90.65,35.12
  Bottom 0.406: IC6.5 v90.65,27 | v90.65,35.12 R37.1
OUTPUT6  (via drill 0.6)
  Top 0.406: v90.65,48.96 v90.65,57.09
  Bottom 0.406: IC7.5 v90.65,48.96 | v90.65,57.09 R44.1
OUTPUT7  (via drill 0.6)
  Top 0.406: v90.65,70.92 v90.65,79.05
  Bottom 0.406: IC8.5 v90.65,70.92 | v90.65,79.05 R51.1
POWER_CTRL
  Bottom 0.406: IC1.3 41.77,6.3 R7.1
POWER_CTRL1
  Bottom 0.406: IC2.3 41.77,28.27 R14.1
POWER_CTRL2
  Bottom 0.406: IC3.3 41.77,50.23 R21.1
POWER_CTRL3
  Bottom 0.406: IC4.3 41.77,72.19 R28.1
POWER_CTRL4
  Bottom 0.406: IC5.3 100.87,6.3 R35.1
POWER_CTRL5
  Bottom 0.406: IC6.3 100.87,28.27 R42.1
POWER_CTRL6
  Bottom 0.406: IC7.3 100.87,50.23 R49.1
POWER_CTRL7
  Bottom 0.406: IC8.3 100.87,72.19 R56.1
USB_POWER  (via drill 0.6)
  Top 0.406: v51.99,11 51.99,6.17 v53.13,5.03
  Bottom 0.406: D2.A v53.13,5.03 | v51.99,11 R4.1
USB_POWER1  (via drill 0.6)
  Top 0.406: v51.99,32.97 51.99,28.14 v53.13,27
  Bottom 0.406: D11.A v53.13,27 | v51.99,32.97 R13.1
USB_POWER2  (via drill 0.6)
  Top 0.406: v51.99,54.93 51.99,50.1 v53.13,48.96
  Bottom 0.406: D17.A v53.13,48.96 | v51.99,54.93 R20.1
USB_POWER3  (via drill 0.6)
  Top 0.406: v51.99,76.89 51.99,72.07 v53.13,70.92
  Bottom 0.406: D23.A v53.13,70.92 | v51.99,76.89 R27.1
USB_POWER4  (via drill 0.6)
  Top 0.406: v111.09,11 111.09,6.17 v112.24,5.03
  Bottom 0.406: D29.A v112.24,5.03 | v111.09,11 R34.1
USB_POWER5  (via drill 0.6)
  Top 0.406: v111.09,32.97 111.09,28.14 v112.24,27
  Bottom 0.406: D35.A v112.24,27 | v111.09,32.97 R41.1
USB_POWER6  (via drill 0.6)
  Top 0.406: v111.09,54.93 111.09,50.1 v112.24,48.96
  Bottom 0.406: D41.A v112.24,48.96 | v111.09,54.93 R48.1
USB_POWER7  (via drill 0.6)
  Top 0.406: v111.09,76.89 111.09,72.07 v112.24,70.92
  Bottom 0.406: D47.A v112.24,70.92 | v111.09,76.89 R55.1
VCC  (via drill 0.6)
  Top 0.406: C2.+ 57.45,13.79 59.74,11.51 59.74,4.67 v59.86,4.54 | v38.91,11 38.91,11.26 40.69,13.03 RLY1.P$2 | ICSP.2 18.59,16.08 20.49,17.99 28.24,17.99 v31.54,14.68
  Bottom 0.406: D2.C 58.9,4.54 v59.86,4.54 Q1.3 | IC1.1 38.91,8.89 v38.91,11 | v31.54,14.68 32.81,13.41 35.35,13.41 37.13,11.64 37.13,11.06 C1.1 v38.91,11 | C2.+ 57.45,14.05 56.43,13.03 40.94,13.03 v38.91,11
VCC1  (via drill 0.6)
  Top 0.406: C4.+ 57.45,35.76 59.74,33.47 59.74,26.63 v59.86,26.5 | v38.91,32.97 38.91,33.22 40.69,35 RLY2.P$2 | ICSP1.2 18.59,38.05 20.49,39.95 28.24,39.95 v31.54,36.65
  Bottom 0.406: D11.C 58.9,26.5 v59.86,26.5 Q4.3 | IC2.1 38.91,30.86 v38.91,32.97 | v31.54,36.65 32.81,35.38 35.35,35.38 37.13,33.6 37.13,33.03 C3.1 v38.91,32.97 | C4.+ 57.45,36.01 56.43,35 40.94,35 v38.91,32.97
VCC2  (via drill 0.6)
  Top 0.406: C6.+ 57.45,57.72 59.74,55.44 59.74,48.6 v59.86,48.47 | v38.91,54.93 38.91,55.18 40.69,56.96 RLY3.P$2 | ICSP2.2 18.59,60.01 20.49,61.91 28.24,61.91 v31.54,58.61
  Bottom 0.406: D17.C 58.9,48.47 v59.86,48.47 Q7.3 | IC3.1 38.91,52.82 v38.91,54.93 | v31.54,58.61 32.81,57.34 35.35,57.34 37.13,55.56 37.13,54.99 C5.1 v38.91,54.93 | C6.+ 57.45,57.98 56.43,56.96 40.94,56.96 v38.91,54.93
VCC3  (via drill 0.6)
  Top 0.406: C8.+ 57.45,79.69 59.74,77.4 59.74,70.56 v59.86,70.43 | v38.91,76.89 38.91,77.15 40.69,78.93 RLY4.P$2 | ICSP3.2 18.59,81.97 20.49,83.88 28.24,83.88 v31.54,80.58
  Bottom 0.406: D23.C 58.9,70.43 v59.86,70.43 Q10.3 | IC4.1 38.91,74.79 v38.91,76.89 | v31.54,80.58 32.81,79.31 35.35,79.31 37.13,77.53 37.13,76.95 C7.1 v38.91,76.89 | C8.+ 57.45,79.94 56.43,78.93 40.94,78.93 v38.91,76.89
VCC4  (via drill 0.6)
  Top 0.406: C10.+ 116.56,13.79 118.84,11.51 118.84,4.67 v118.97,4.54 | v98.01,11 98.01,11.26 99.79,13.03 RLY5.P$2 | ICSP4.2 77.69,16.08 79.6,17.99 87.35,17.99 v90.65,14.68
  Bottom 0.406: D29.C 118.01,4.54 v118.97,4.54 Q13.3 | IC5.1 98.01,8.89 v98.01,11 | v90.65,14.68 91.92,13.41 94.46,13.41 96.24,11.64 96.24,11.06 C9.1 v98.01,11 | C10.+ 116.56,14.05 115.54,13.03 100.05,13.03 v98.01,11
VCC5  (via drill 0.6)
  Top 0.406: C12.+ 116.56,35.76 118.84,33.47 118.84,26.63 v118.97,26.5 | v98.01,32.97 98.01,33.22 99.79,35 RLY6.P$2 | ICSP5.2 77.69,38.05 79.6,39.95 87.35,39.95 v90.65,36.65
  Bottom 0.406: D35.C 118.01,26.5 v118.97,26.5 Q16.3 | IC6.1 98.01,30.86 v98.01,32.97 | v90.65,36.65 91.92,35.38 94.46,35.38 96.24,33.6 96.24,33.03 C11.1 v98.01,32.97 | C12.+ 116.56,36.01 115.54,35 100.05,35 v98.01,32.97
VCC6  (via drill 0.6)
  Top 0.406: C14.+ 116.56,57.72 118.84,55.44 118.84,48.6 v118.97,48.47 | v98.01,54.93 98.01,55.18 99.79,56.96 RLY7.P$2 | ICSP6.2 77.69,60.01 79.6,61.91 87.35,61.91 v90.65,58.61
  Bottom 0.406: D41.C 118.01,48.47 v118.97,48.47 Q19.3 | IC7.1 98.01,52.82 v98.01,54.93 | v90.65,58.61 91.92,57.34 94.46,57.34 96.24,55.56 96.24,54.99 C13.1 v98.01,54.93 | C14.+ 116.56,57.98 115.54,56.96 100.05,56.96 v98.01,54.93
VCC7  (via drill 0.6)
  Top 0.406: C16.+ 116.56,79.69 118.84,77.4 118.84,70.56 v118.97,70.43 | v98.01,76.89 98.01,77.15 99.79,78.93 RLY8.P$2 | ICSP7.2 77.69,81.97 79.6,83.88 87.35,83.88 v90.65,80.58
  Bottom 0.406: D47.C 118.01,70.43 v118.97,70.43 Q22.3 | IC8.1 98.01,74.79 v98.01,76.89 | v90.65,80.58 91.92,79.31 94.46,79.31 96.24,77.53 96.24,76.95 C15.1 v98.01,76.89 | C16.+ 116.56,79.94 115.54,78.93 100.05,78.93 v98.01,76.89
Z
  Bottom 0.406: D4.A D5.A 44.49,11.25 45.64,12.4 56.81,12.4 62.66,18.24 63.48,18.24 R1.2
Z1
  Bottom 0.406: D10.A D7.A 44.49,33.21 45.64,34.36 56.81,34.36 62.66,40.2 63.48,40.2 R8.2
Z2
  Bottom 0.406: D16.A D13.A 44.49,55.18 45.64,56.33 56.81,56.33 62.66,62.17 63.48,62.17 R15.2
Z3
  Bottom 0.406: D22.A D19.A 44.49,77.14 45.64,78.29 56.81,78.29 62.66,84.13 63.48,84.13 R22.2
Z4
  Bottom 0.406: D28.A D25.A 103.59,11.25 104.75,12.4 115.92,12.4 121.76,18.24 122.59,18.24 R29.2
Z5
  Bottom 0.406: D34.A D31.A 103.59,33.21 104.75,34.36 115.92,34.36 121.76,40.2 122.59,40.2 R36.2
Z6
  Bottom 0.406: D40.A D37.A 103.59,55.18 104.75,56.33 115.92,56.33 121.76,62.17 122.59,62.17 R43.2
Z7
  Bottom 0.406: D46.A D43.A 103.59,77.14 104.75,78.29 115.92,78.29 121.76,84.13 122.59,84.13 R50.2

## Text on the board
tDocu: USB / PWR | USB / PWR | - | - | + | + | Latchbox | Latchbox | sixty four pixels | sixty four pixels | oneswitch.org.uk | oneswitch.org.uk | pcb rev 4 | pcb rev 4 | USB / PWR | USB / PWR | - | - | + | + | Latchbox | Latchbox | sixty four pixels | sixty four pixels | oneswitch.org.uk | oneswitch.org.uk | pcb rev 4 | pcb rev 4 | USB / PWR | USB / PWR | - | - | + | + | Latchbox | Latchbox | sixty four pixels | sixty four pixels | oneswitch.org.uk | oneswitch.org.uk | pcb rev 4 | pcb rev 4 | USB / PWR | USB / PWR | - | - | + | + | Latchbox | Latchbox | sixty four pixels | sixty four pixels | oneswitch.org.uk | oneswitch.org.uk | pcb rev 4 | pcb rev 4
_tPlace: RLY1 | RLY1 | OUT | IN | OUT | IN | RLY1 | RLY1 | OUT | IN | OUT | IN | RLY1 | RLY1 | OUT | IN | OUT | IN | RLY1 | RLY1 | OUT | IN | OUT | IN
_bPlace: D6 | D6 | D5 | D5 | D4 | D4 | D3 | D3 | D6 | D6 | D5 | D5 | D4 | D4 | D3 | D3 | D6 | D6 | D5 | D5 | D4 | D3 | D4 | D3 | D6 | D6 | D5 | D5 | D4 | D3 | D4 | D3
_tNames: LED1 | S1 | LED1 | S1 | LED2 | LED2 | C2 | C2 | BATT | BATT | ICSP | ICSP | LED1 | S1 | LED1 | S1 | LED2 | LED2 | C2 | C2 | BATT | BATT | ICSP | ICSP | LED1 | S1 | LED1 | S1 | LED2 | LED2 | C2 | C2 | BATT | BATT | ICSP | ICSP | LED1 | S1 | LED1 | S1 | LED2 | LED2 | C2 | C2 | BATT | BATT | ICSP | ICSP
_bNames: R6 | R6 | R1 | R1 | R2 | R2 | Q2 | Q2 | R4 | R4 | R5 | C1 | D1 | R5 | C1 | D1 | R3 | R3 | Q1 | F1 | Q1 | F1 | D2 | D2 | IC1 | R7 | IC1 | R7 | Q3 | Q3 | R6 | R6 | R1 | R1 | R2 | R2 | Q2 | Q2 | R4 | R4 | R5 | C1 | D1 | R5 | C1 | D1 | R3 | R3 | Q1 | F1 | Q1 | F1 | D2 | D2 | IC1 | R7 | IC1 | R7 | Q3 | Q3 | R6 | R6 | R1 | R1 | R2 | R2 | Q2 | Q2 | R4 | R4 | R5 | C1 | D1 | R5 | C1 | D1 | R3 | R3 | Q1 | F1 | Q1 | F1 | D2 | D2 | IC1 | R7 | IC1 | R7 | Q3 | Q3 | R6 | R6 | R1 | R1 | R2 | R2 | Q2 | Q2 | R4 | R4 | R5 | C1 | D1 | R5 | C1 | D1 | R3 | R3 | Q1 | F1 | Q1 | F1 | D2 | D2 | IC1 | R7 | Q3 | IC1 | R7 | Q3